# Altium PCB Flight_Controller.PcbDoc (part 3 of 4)
Units mil, origin at the board's own origin, x right, y up, seen from the top; angles counter-clockwise.
Board outline 2353.5 x 3084.1 mil, 4 copper layers (Top Layer, Layer 2, Layer 1, Bottom Layer), stack 62.48 mil thick; 95 components, 80 nets, 358 pads, 134 vias.
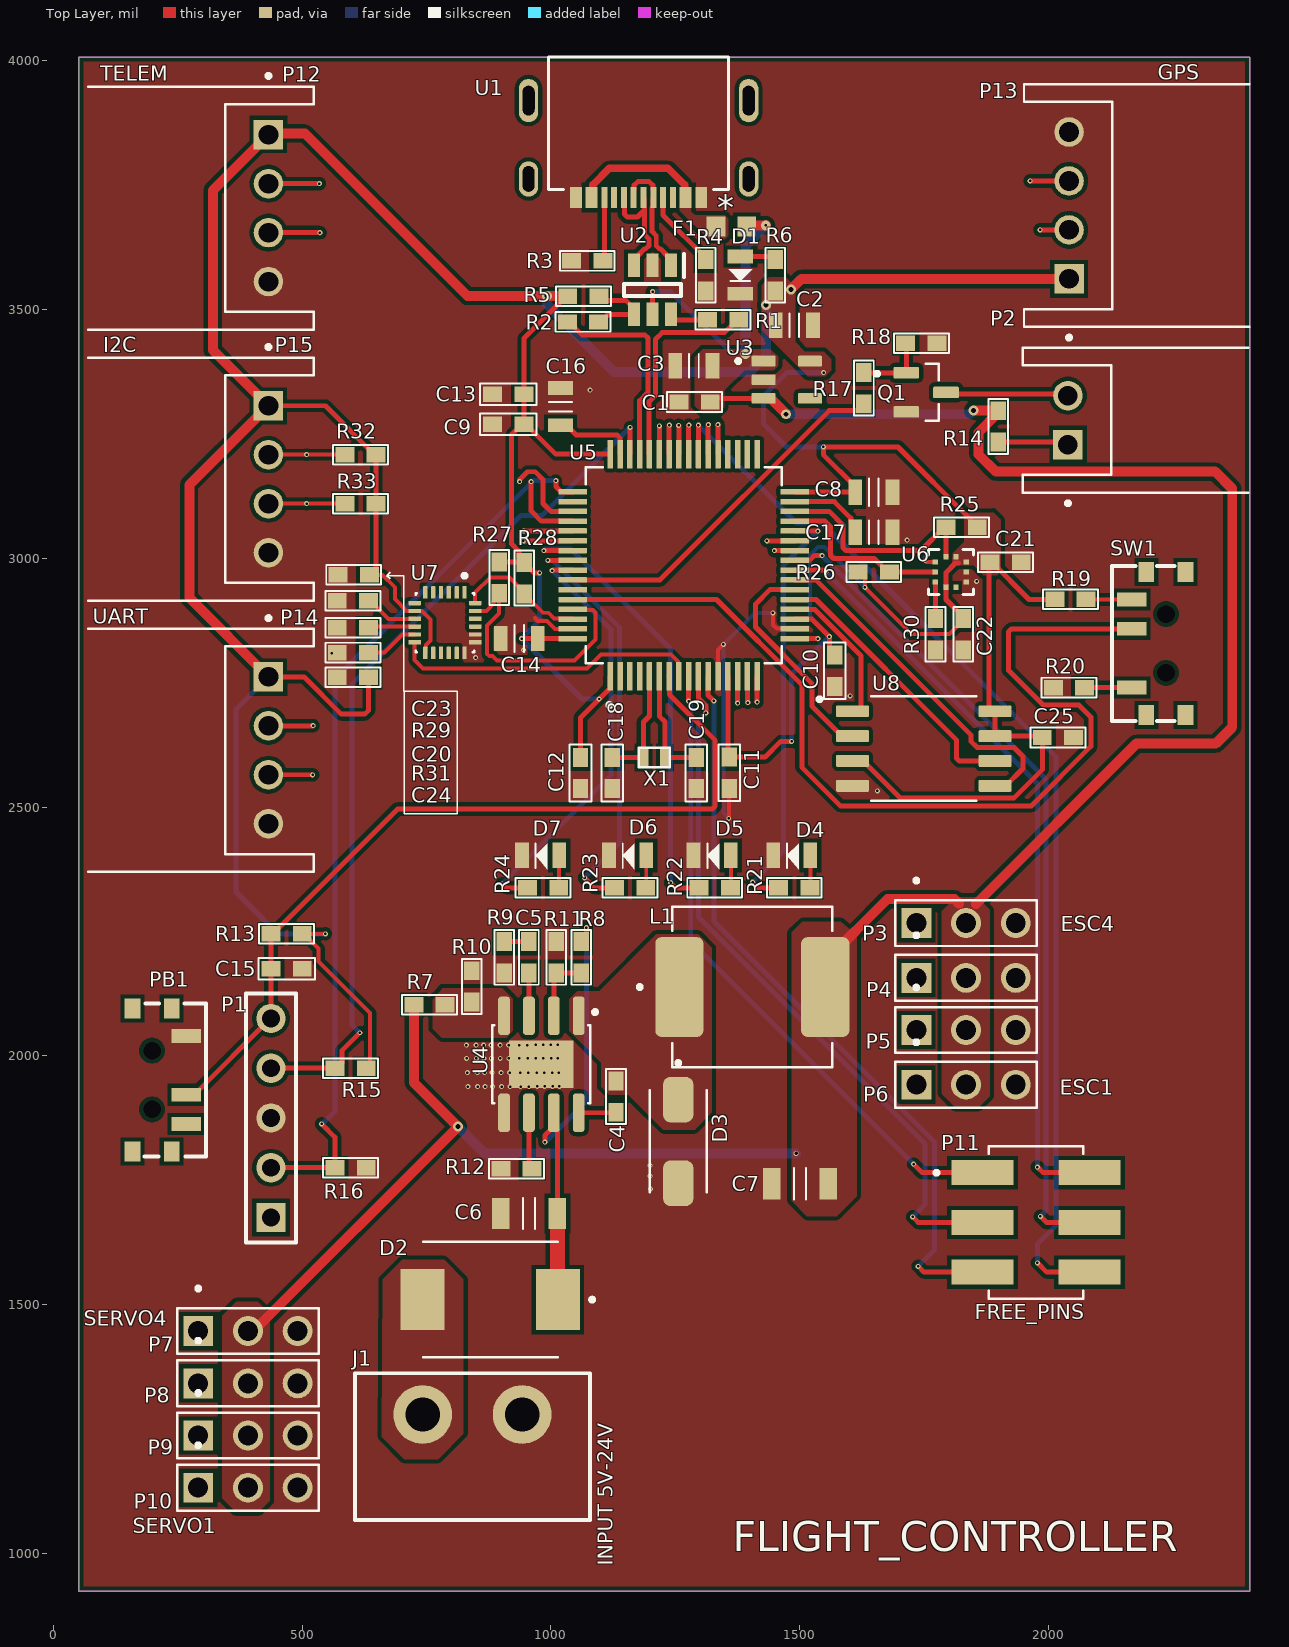
[diagram p0: Top Layer view]

## Part data (continued)
U5: "MCU 32-bit STM32F ARM Cortex M4F RISC 1024KB Flash 2.5V/3.3V 64-Pin LQFP Tray", Ambient Temperature Range High=85°C, Case/Package=LFQFP, Frequency=168MHz, Manufacturer=STMicroelectronics, Max Junction Temperature (Tj)=105°C, Max Supply Current=109mA, Max Supply Voltage=3.6V, Min Operating Temperature=-40°C, Min Supply Voltage=1.8V, Nominal Supply Current=1.7µA, Nominal Supply Voltage (DC)=3.3V, Temperature Grade=Industrial, ADC Channels (Resolution)="16-Ch 12-Bit", Category=Microcontrollers, China RoHS=Compliant, ComponentLink1Description=https://datasheet.octopart.com:443/STM32F405RGT6-STMicroelectronics-datasheet-181247466.pdf?src-supplier=IHS, ComponentLink1URL=https://datasheet.octopart.com:443/STM32F405RGT6-STMicroelectronics-datasheet-181247466.pdf?src-supplier=IHS, ComponentLink2Description=https://datasheet.octopart.com:443/STM32F405RGT6-STMicroelectronics-datasheet-12357803.pdf?src-supplier=Upverter, ComponentLink2URL=https://datasheet.octopart.com:443/STM32F405RGT6-STMicroelectronics-datasheet-12357803.pdf?src-supplier=Upverter, ComponentLink3Description=https://datasheet.octopart.com:443/STM32F405RGT6-STMicroelectronics-datasheet-10836202.pdf?src-supplier=Upverter, ComponentLink3URL=https://datasheet.octopart.com:443/STM32F405RGT6-STMicroelectronics-datasheet-10836202.pdf?src-supplier=Upverter, ComponentLink4Description=https://datasheet.octopart.com:443/STM32F405RGT6-STMicroelectronics-datasheet-68300831.pdf?src-supplier=ODG+(Origin+Data+Global), ComponentLink4URL=https://datasheet.octopart.com:443/STM32F405RGT6-STMicroelectronics-datasheet-68300831.pdf?src-supplier=ODG+(Origin+Data+Global), ComponentLink5Description=https://datasheet.octopart.com:443/STM32F405RGT6-STMicroelectronics-datasheet-62336716.pdf?src-supplier=STMicroelectronics, ComponentLink5URL=https://datasheet.octopart.com:443/STM32F405RGT6-STMicroelectronics-datasheet-62336716.pdf?src-supplier=STMicroelectronics, ComponentLink6Description=https://datasheet.octopart.com:443/STM32F405RGT6-STMicroelectronics-datasheet-159624841.pdf?src-supplier=Burklin+Elektronik, ComponentLink6URL=https://datasheet.octopart.com:443/STM32F405RGT6-STMicroelectronics-datasheet-159624841.pdf?src-supplier=Burklin+Elektronik, ComponentLink7Description=https://datasheet.octopart.com:443/STM32F405RGT6-STMicroelectronics-datasheet-41340394.pdf?src-supplier=TME, ComponentLink7URL=https://datasheet.octopart.com:443/STM32F405RGT6-STMicroelectronics-datasheet-41340394.pdf?src-supplier=TME, ComponentLink8Description=https://datasheet.octopart.com:443/STM32F405RGT6-STMicroelectronics-datasheet-16486449.pdf?src-supplier=Newark, ComponentLink8URL=https://datasheet.octopart.com:443/STM32F405RGT6-STMicroelectronics-datasheet-16486449.pdf?src-supplier=Newark, ComponentLink9Description=https://datasheet.octopart.com:443/STM32F405RGT6-STMicroelectronics-datasheet-14878676.pdf?src-supplier=Farnell, ComponentLink9URL=https://datasheet.octopart.com:443/STM32F405RGT6-STMicroelectronics-datasheet-14878676.pdf?src-supplier=Farnell, ComponentLink10Description=https://datasheet.octopart.com:443/STM32F405RGT6-STMicroelectronics-datasheet-10709433.pdf?src-supplier=Farnell, ComponentLink10URL=https://datasheet.octopart.com:443/STM32F405RGT6-STMicroelectronics-datasheet-10709433.pdf?src-supplier=Farnell, Core Architecture="ARM Cortex-M4", Country of Origin="Mainland China, Malaysia, Taiwan", DAC Channels (Resolution)="2-Ch 12-Bit", Data Bus Width=32b, EEPROM Memory Size=0B, Export Control Classification Number (ECCN) Code=3A991.A.2, Flash Memory Size=1MB, Harmonized Tariff Schedule (HTS) Code=8542.31.00.25, Height=1.6mm, Height - Seated (Max)=1.6mm, Lead Free="Lead Free", Length=10mm, Lifecycle Status=Production, Manufacturer Part Number=STM32F405RGT6, Max Frequency=168MHz, Max Operating Temperature=85°C, Memory Size=1MB, Memory Type=FLASH, Number of A/D Converters=3, Number of ADC Channels=16, Number of Channels=16, Number of D/A Converters=2, Number of Pins=64, Number of Programmable I/O=51, Number of PWM Channels=2, Number of SPI Channels=3, Number of Terminals=64, Number of Timers/Counters=15, Number of UART Channels=2, Number of USART Channels=4, Number of USB Channels=2, Number of I2C Channels=3, Number of I/Os=8, Number of Interrupts=16, Oscillator Type=Internal, Peripherals="POR, RTC", Pricing 1="160=5,69, 320=5,66, 480=5,65, 640=5,64, 800=5,6 (USD)", Radiation Hardening=No, RAM Size=196kB, REACH SVHC=Yes, RoHS=Compliant, Schedule B="8542310000, 8542310000|8542310000|8542310000|8542310000|8542310000", Stock 1=1120, Supplier 1="Future Electronics", Supplier Part Number 1=STM32F405RGT6, Terminal Pitch=500µm, Watchdog Timer=Yes, Width=10mm, Interface="CAN, I2C, I2S, IrDA, SPI, UART, USART, USB", Introduction Date=2013-06-04
U6: "3.0 Shuttle Board Dev Kit BMP390", Manufacturer="Bosch Sensortec", Manufacturer Part Number="SHUTTLE BOARD 3.0 BMP390", Category=Uncategorized, ComponentLink1Description=https://datasheet.octopart.com:443/SHUTTLE-BOARD-3.0-BMP390-Bosch-Sensortec-datasheet-179288316.pdf?src-supplier=Future+Electronics, ComponentLink1URL=https://datasheet.octopart.com:443/SHUTTLE-BOARD-3.0-BMP390-Bosch-Sensortec-datasheet-179288316.pdf?src-supplier=Future+Electronics, Pricing 1="2=14,76, 10=14,59, 30=14,48, 125=14,33, 300=14,12 (USD)", RoHS=Compliant, Supplier 1="Future Electronics", Supplier Part Number 1="SHUTTLE BOARD 3.0 BMP390"
U7: library part ICM-20948, "IMU (Inertial Measurement Unit), 9-Axis, Accelerometer, Gyroscope, Compass", Ambient Temperature Range High=85°C, Manufacturer=TDK, Manufacturer Lifecycle Status="PRODUCTION (NOT RECOMMENDED FOR NEW DESIGN)", Max Supply Voltage=3.6V, Min Operating Temperature=-40°C, Min Supply Voltage=1.71V, Nominal Supply Voltage (DC)=1.8V, Temperature Grade=Industrial, Category="Inertial Measurement Units (IMUs)", ComponentLink1Description=https://datasheet.octopart.com:443/ICM-20948-InvenSense-datasheet-165301323.pdf?src-supplier=TDK, ComponentLink1URL=https://datasheet.octopart.com:443/ICM-20948-InvenSense-datasheet-165301323.pdf?src-supplier=TDK, ComponentLink2Description=https://datasheet.octopart.com:443/ICM-20948-InvenSense-datasheet-155375717.pdf?src-supplier=TDK, ComponentLink2URL=https://datasheet.octopart.com:443/ICM-20948-InvenSense-datasheet-155375717.pdf?src-supplier=TDK, ComponentLink3Description=https://datasheet.octopart.com:443/ICM-20948-InvenSense-datasheet-115290367.pdf?src-supplier=Ciiva, ComponentLink3URL=https://datasheet.octopart.com:443/ICM-20948-InvenSense-datasheet-115290367.pdf?src-supplier=Ciiva, ComponentLink4Description=https://datasheet.octopart.com:443/ICM-20948-TDK-datasheet-181267871.pdf?src-supplier=IHS, ComponentLink4URL=https://datasheet.octopart.com:443/ICM-20948-TDK-datasheet-181267871.pdf?src-supplier=IHS, ComponentLink5Description=https://datasheet.octopart.com:443/ICM-20948-InvenSense-datasheet-81456500.pdf?src-supplier=Component+Distributors+Inc., ComponentLink5URL=https://datasheet.octopart.com:443/ICM-20948-InvenSense-datasheet-81456500.pdf?src-supplier=Component+Distributors+Inc., ComponentLink6Description=https://datasheet.octopart.com:443/ICM-20948-InvenSense-datasheet-79613978.pdf?src-supplier=Component+Distributors+Inc., ComponentLink6URL=https://datasheet.octopart.com:443/ICM-20948-InvenSense-datasheet-79613978.pdf?src-supplier=Component+Distributors+Inc., ComponentLink7Description=https://datasheet.octopart.com:443/ICM-20948-InvenSense-datasheet-62330990.pdf?src-supplier=Component+Distributors+Inc., ComponentLink7URL=https://datasheet.octopart.com:443/ICM-20948-InvenSense-datasheet-62330990.pdf?src-supplier=Component+Distributors+Inc., Height=980µm, Height - Seated (Max)=1.05mm, Length=3mm, Lifecycle Status=NRND, LTB Date=2026-04-15, LTD Date=2026-10-30, Manufacturer Part Number=ICM-20948, Max Length=3.1mm, Max Operating Temperature=85°C, Max Thickness=1.05mm, Max Width=3.1mm, Min Length=2.9mm, Min Thickness=950µm, Min Width=2.9mm, Mount="Surface Mount", Number of Circuits=1, Number of Terminals=24, Pricing 1="1=4,14 (EUR)", REACH SVHC=Yes, RoHS=Compliant, Supplier 1=Farnell, Supplier Part Number 1=ICM-20948, Terminal Pitch=400µm, Width=3mm, Introduction Date=2017-06-02